# Altium PCB PCB1.PcbDoc
Units mm, origin at the board's own origin, x right, y up, seen from the top; angles counter-clockwise.
Board outline 40.09 x 34.92 mm, 2 copper layers (Top Layer, Bottom Layer); 18 components, 11 nets, 52 pads, 5 vias.
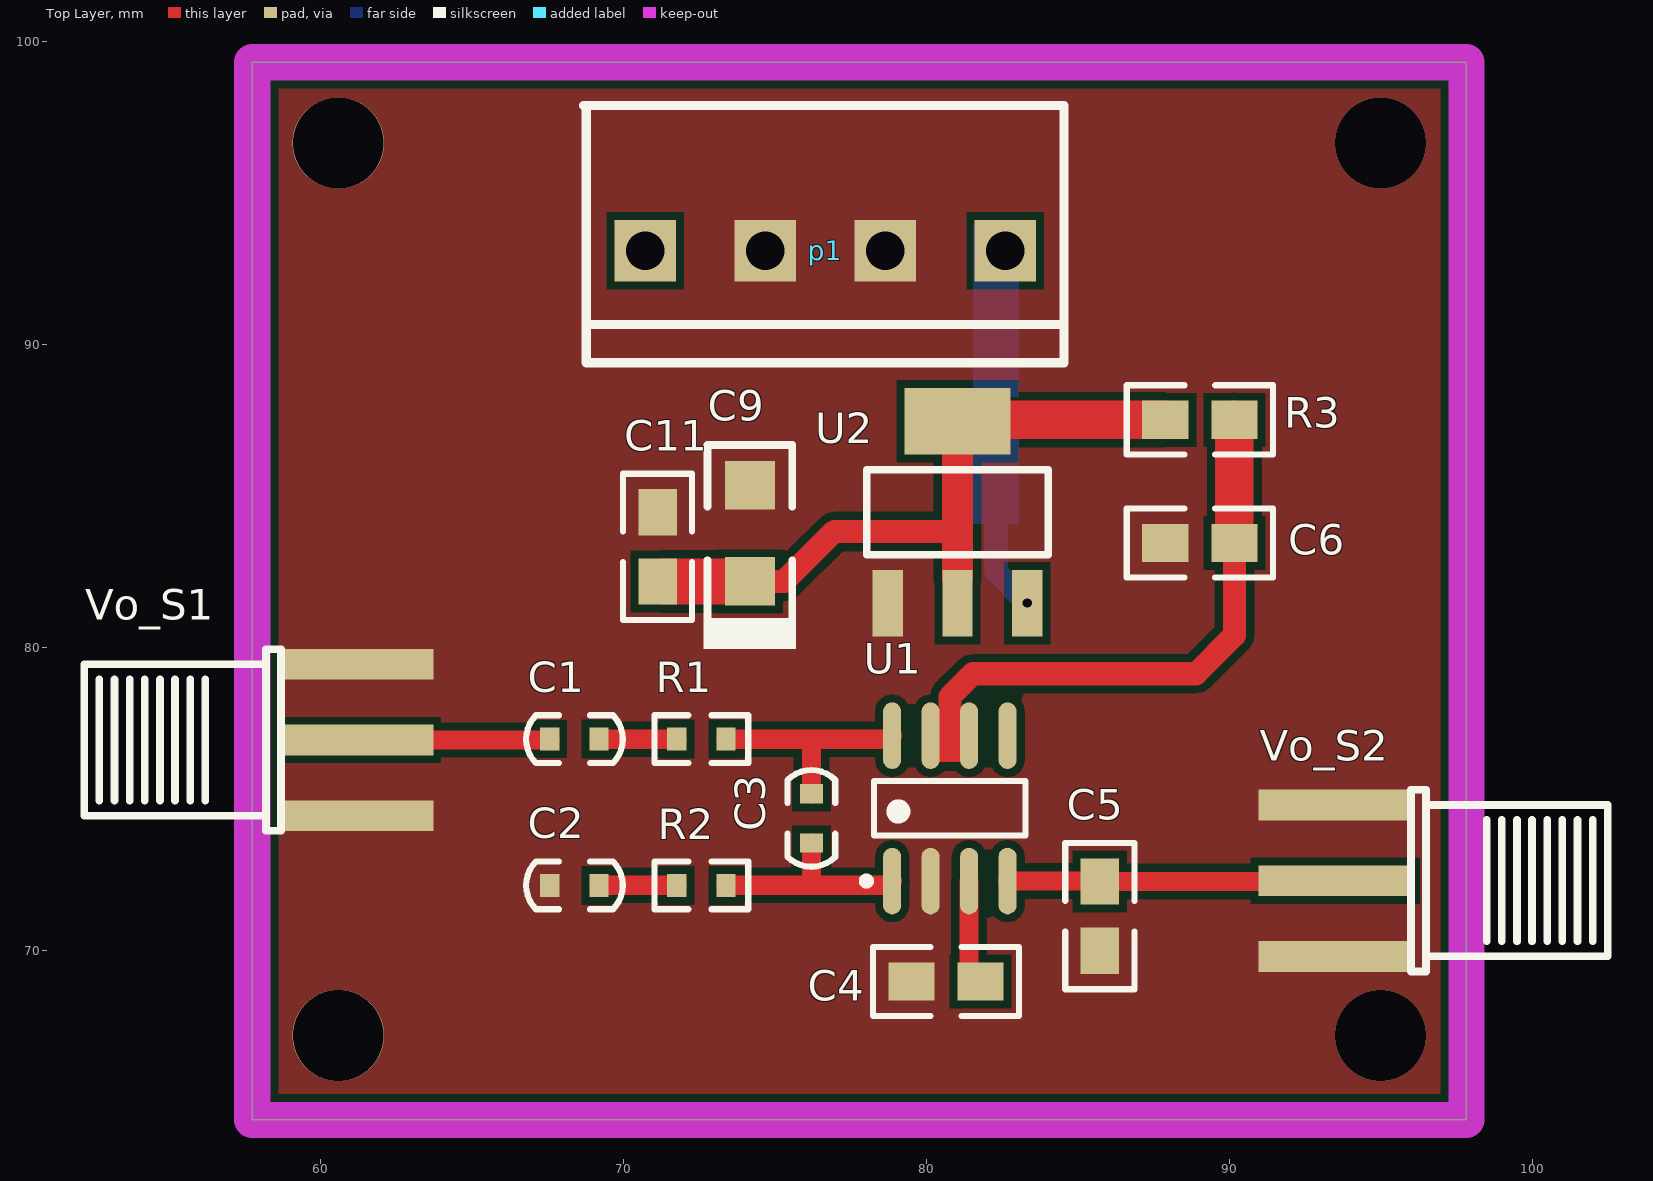
[diagram p0: Top Layer view]
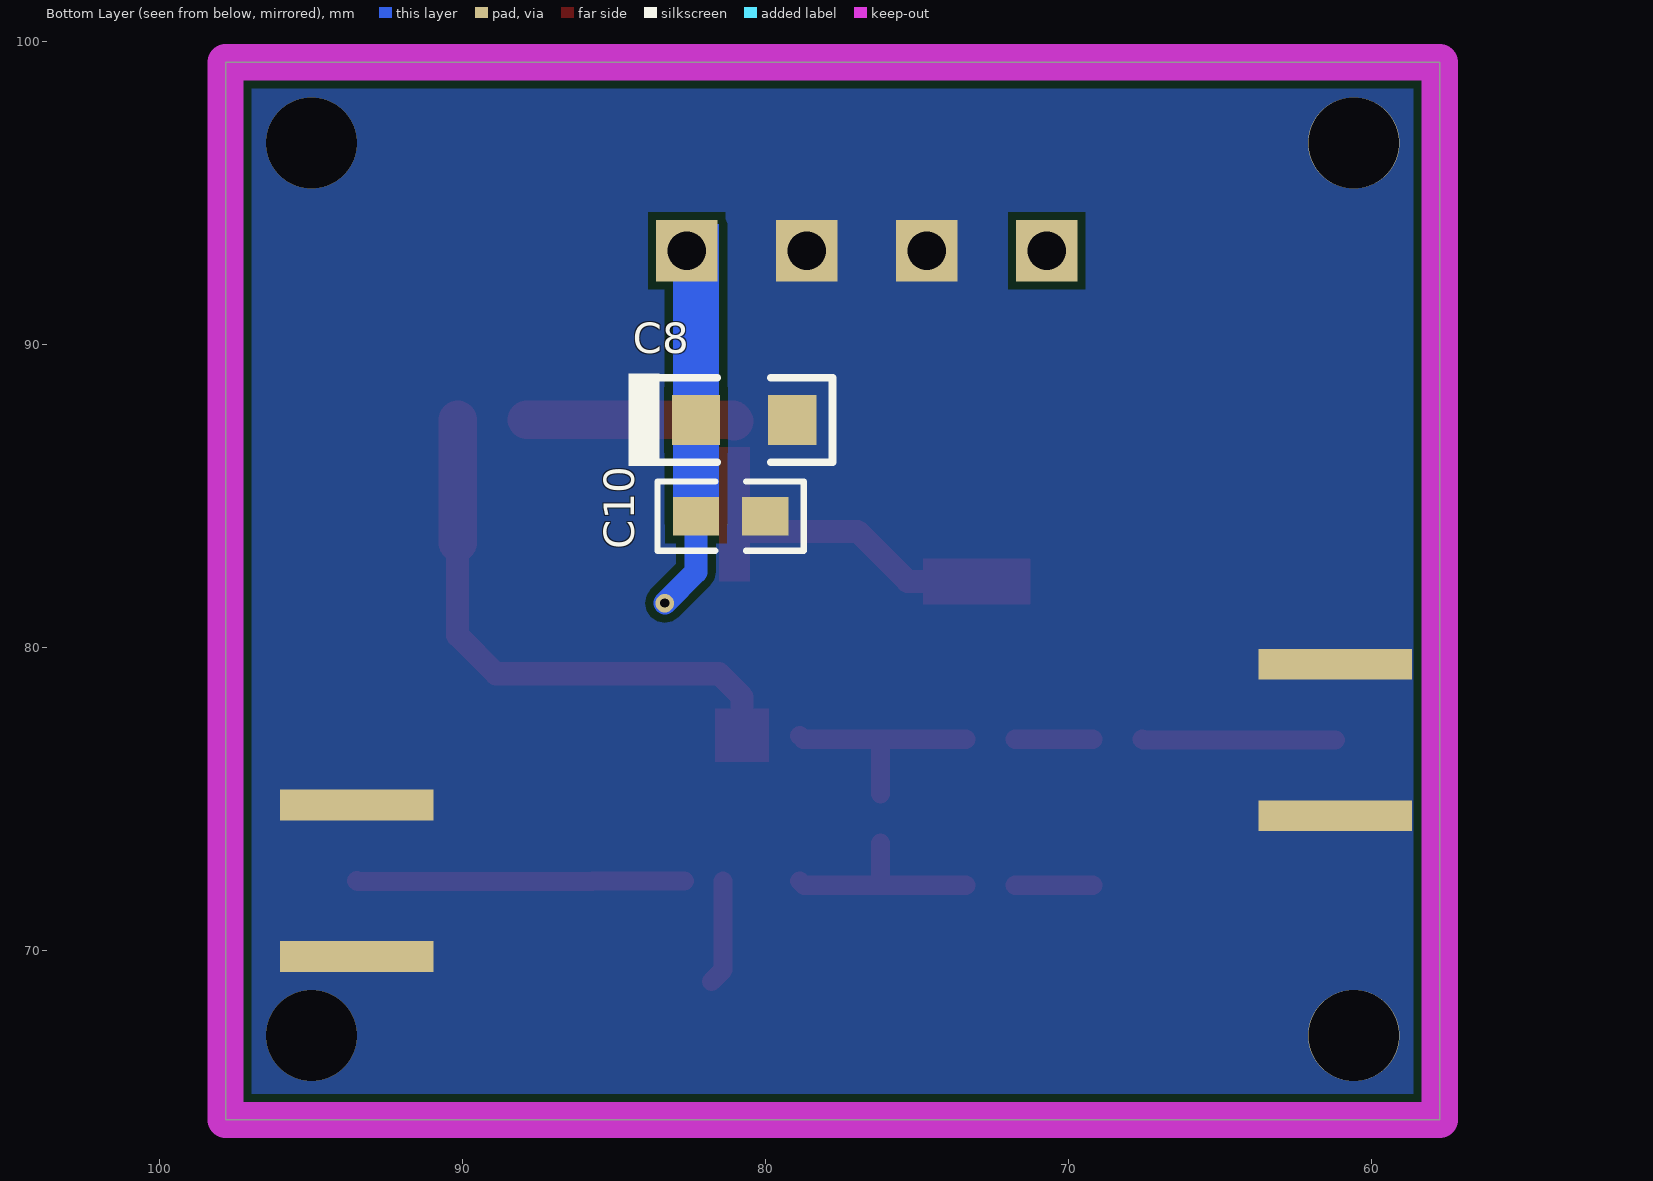
[diagram p1: Bottom Layer view, seen from below]

## Layer stack, top to bottom
Top Solder: solder mask 0.0102, Solder Resist, Dk 3.5
Top Layer: signal copper 0.0356
Dielectric 1: dielectric 0.32, FR-4, Dk 4.8
Bottom Layer: signal copper 0.0356
Bottom Solder: solder mask 0.0102, Solder Resist, Dk 3.5

## Board outline
57.741,64.389 97.83,64.389 97.83,99.314 57.741,99.314

## Design rules (kind name [scope] priority, off if disabled: settings)
Clearance [All] p1: gap=0.254
PlaneConnect [All] p1: planeconnectstyle=Direct reliefexpansion=0.508 reliefentries=4 reliefconductorwidth=0.254 reliefairgap=0.254
PolygonConnect [All] p1: connectstyle=Direct reliefconductorwidth=0.254 reliefentries=4 polygonreliefangle="90 Angle" airgapwidth=0.254
RoutingVias [All] p1: holewidth=0.711 width=1.27 viastyle="Through Hole" minholewidth=0.711 minwidth=1.27 maxholewidth=0.711 maxwidth=1.27
SolderMaskExpansion [All] p1: expansion=0.102
Width [All] p1: maxlimit=2.54 minlimit=0.152 preferedwidth=0.254
29 further rules are at their usual default settings.

## Components (designator, comment, footprint, x,y, rotation, side; value= is the part's Value field where it differs from the comment)
C1 "0.1uf" 0603C 67.564,76.962 r0 top
C2 "0.1uf" 0603C 67.564,72.136 r0 top
C3 "0.1uf" 0603C 76.2,73.533 r90 top
C4 "0.1uf" 0805 81.788,68.961 r180 top
C5 "0.1uf" 0805 85.725,72.263 r270 top
C6 "0.1uf" 0805 90.17,83.439 r180 top
C8 "Cap" 3216C-TYPE_A 82.296,87.503 r0 bottom
C9 "Cap" 3216C-TYPE_A 74.168,82.169 r270 top
C10 "0.1uf" 0805 80.01,84.328 r0 bottom
C11 "0.1uf" 0805 71.12,84.455 r270 top
p1 "VH3.96-4A" VH3.96-4P 84.546,89.391 r180 top
R1 "0" 0603R 72.568,76.962 r0 top
R2 "0" 0603R 72.568,72.136 r0 top
R3 "4R7" 0805 87.884,87.503 r0 top
U1 "AD8307ARZ" ADI-R-8_N 80.772,74.676 r90 top
U2 "AMS1117-3.3V" SOT-223 81.026,84.455 r270 top
Vo_S1 "差分输出" SMA-LYING 59.69,76.835 r0 top
Vo_S2 "差分输出" SMA-LYING 94.996,72.39 r180 top

## Footprints (in the part's own frame and the unit in brackets; to place one, negate y for a bottom-side part, rotate by r counter-clockwise, add the part's x,y. Pads: shape width x height; smd on the part's side, far side on the other; paste and mask are expansions set on the pad)
0603C [mil]
  rect 25x30 smd: 1(0,0) 2(64,0)
  silkscreen extent -31,-31 95,31
0603R [mil]
  rect 25x30 smd: 1(-32,0) 2(32,0)
  silkscreen extent -61,-31 61,31
0805 [mil]
  rect 60x50 smd: 1(0,0) 2(90,0)
  silkscreen extent -50,-45 140,45
3216C-TYPE_A [mm]
  rect 1.6x1.65 smd: 1(0,0) 2(-3.175,0)
  silkscreen extent -4.51,-1.54 2.22,1.52
ADI-R-8_N [mm] "SOIC, 8-Leads, Body 4.9x3.9mm, Pitch 1.27mm, IPC Medium Density"
  oval 2.2x0.6 smd: 1(-2.4,1.905) 2(-2.4,0.635) 3(-2.4,-0.635) 4(-2.4,-1.905) 5(2.4,-1.905) 6(2.4,-0.635) 7(2.4,0.635) 8(2.4,1.905)
  silkscreen extent -2.52,-2.5 0.9,2.88, body extent -2,-2.5 2,2.5, height 1.75
SMA-LYING [mm]
  rect 5.08x1.016 smd: 0(1.5,0.1) 1(1.5,-2.4) 1(1.5,2.6)
  rect 5.08x1.016 smd far side: 1(1.5,-2.4) 1(1.5,2.6)
  silkscreen extent -7.5,-2.9 -1,3.1
SOT-223 [mm]
  rect 2.2x1 smd: 1(3,-2.3) 2(3,0) 3(3,2.3)
  rect 2.2x3.5 smd: 2(-3,0)
  silkscreen extent -1.4,-3 1.4,3, body extent -3.49,-3.24 3.49,3.24, height 1.64
VH3.96-4P [mm]
  rect 2.032x2.032 hole 1.27: 1(1.95,-3.7) 2(5.91,-3.7) 3(9.87,-3.7) 4(13.83,-3.7)
  silkscreen extent 0,-8.5 15.87,0

## Part data
C1 C2 C3 C4 C5 C6 C10 C11: library part Cap
C8 C9: library part "Tantalium Cap"
R1 R2 R3: library part Res
U1: "Low Cost, DC to 500 MHz, 92 dB Logarithmic Amplifier, 400ns Response Time, R-8, Pb-Free, 98 Tube"
Vo_S1 Vo_S2: library part SMA

## Via types
v1: diameter 3.01, hole 3, Top Layer to Bottom Layer, 4 vias
v2: diameter 0.61, hole 0.305, Top Layer to Bottom Layer, 1 vias

## Nets (pads, with @x,y where several pads share a name; then routed paths per layer and width w, separated by ;. In a path a pad name is that pad's centre, name@x,y a point inside that pad or via, vN(x,y) a via of type N, cw(c..) or ccw(c..) an arc to the next point about the centre after c; other vN are vias at no path point)
5V: C9.1 C11.2 R3.1 U2.2 | length 14
  Top Layer w0.762: C9.1 75.311,82.169 76.962,83.82 80.645,83.82
  Top Layer w1.27: U2.2@81.026,87.455 81.074,87.503 R3.1
GND: C2.1 C4.2 C5.2 C6.2 C8.2 C9.2 C10.1 C11.1 p1.2 p1.3 U1.2 U2.1 Vo_S1.1 Vo_S2.1
  other v1: 60.579,67.183 94.996,67.183 60.579,96.647 94.996,96.647
NetC1_1: C1.1 Vo_S1.0 | length 6.4
  Top Layer w0.635: Vo_S1.0 67.537,76.935 C1.1
NetC1_2: C1.2 R1.1 | length 2.6
  Top Layer w0.635: C1.2 R1.1
NetC2_2: C2.2 R2.1 | length 2.6
  Top Layer w0.635: C2.2 R2.1
NetC3_1: C3.1 R2.2 U1.1 | length 7
  Top Layer w0.635: R2.2 76.327,72.136 ; C3.1 76.2,72.263 76.327,72.136 ; U1.1 78.727,72.136 76.327,72.136
NetC3_2: C3.2 R1.2 U1.8 | length 7.4
  Top Layer w0.635: R1.2 76.327,76.962 ; C3.2 76.2,76.835 76.327,76.962 ; U1.8 78.753,76.962 76.327,76.962
NetC4_1: C4.1 U1.3 | length 3.5
  Top Layer w0.635: U1.3 81.407,69.342 C4.1
NetC5_1: C5.1 U1.4 Vo_S2.0 | length 10.8
  Top Layer w0.635: U1.4 85.712,72.276 C5.1 93.469,72.263 Vo_S2.0
NetC6_1: C6.1 R3.2 U1.6 U1.7 | length 18.6
  Top Layer w0.762: 80.772,77.089 80.772,78.359 81.534,79.121 88.9,79.121 90.17,80.391 C6.1
  Top Layer w1.27: C6.1 R3.2
NetC8_1: C8.1 C10.2 p1.1 U2.3 | length 3.3
  Bottom Layer w0.762: C10.2 82.296,82.485 v2(83.326,81.455)
pads on no net: p1.4 U1.5

## Polygon pours and split planes (outlines as drawn)
GND on Top Layer "Top Layer-No Net" (solid, pour order 0): 57.741,99.187 57.741,64.643 97.576,64.643 97.83,64.389 97.83,99.314
GND on Bottom Layer "Top Layer-No Net" (solid, pour order 2): 57.741,99.314 57.741,64.306 57.785,64.262 57.912,64.389 97.83,64.389 97.83,99.314

## Keep-outs
Keep-Out Layer:
  the board outline again, w1.2

## Other copper
Top Layer:
  region net 5V: 81.534,82.169 81.534,86.614 80.518,86.614 80.518,82.169
  rectangle net NetC6_1: 79.883,76.2 81.661,77.978
  rectangle net 5V: 71.247,81.407 74.803,82.931
Bottom Layer:
  rectangle net NetC8_1: 81.534,84.074 83.058,87.249
  rectangle net NetC8_1: 81.534,88.265 83.058,93.98